# Altium PCB ECE315_F21.PcbDoc (part 2 of 2)
Units mil, origin at the board's own origin, x right, y up, seen from the top; angles counter-clockwise.
Board outline 3940 x 3940 mil, 2 copper layers (Top Layer, Bottom Layer); 72 components, 56 nets, 251 pads, 112 vias.
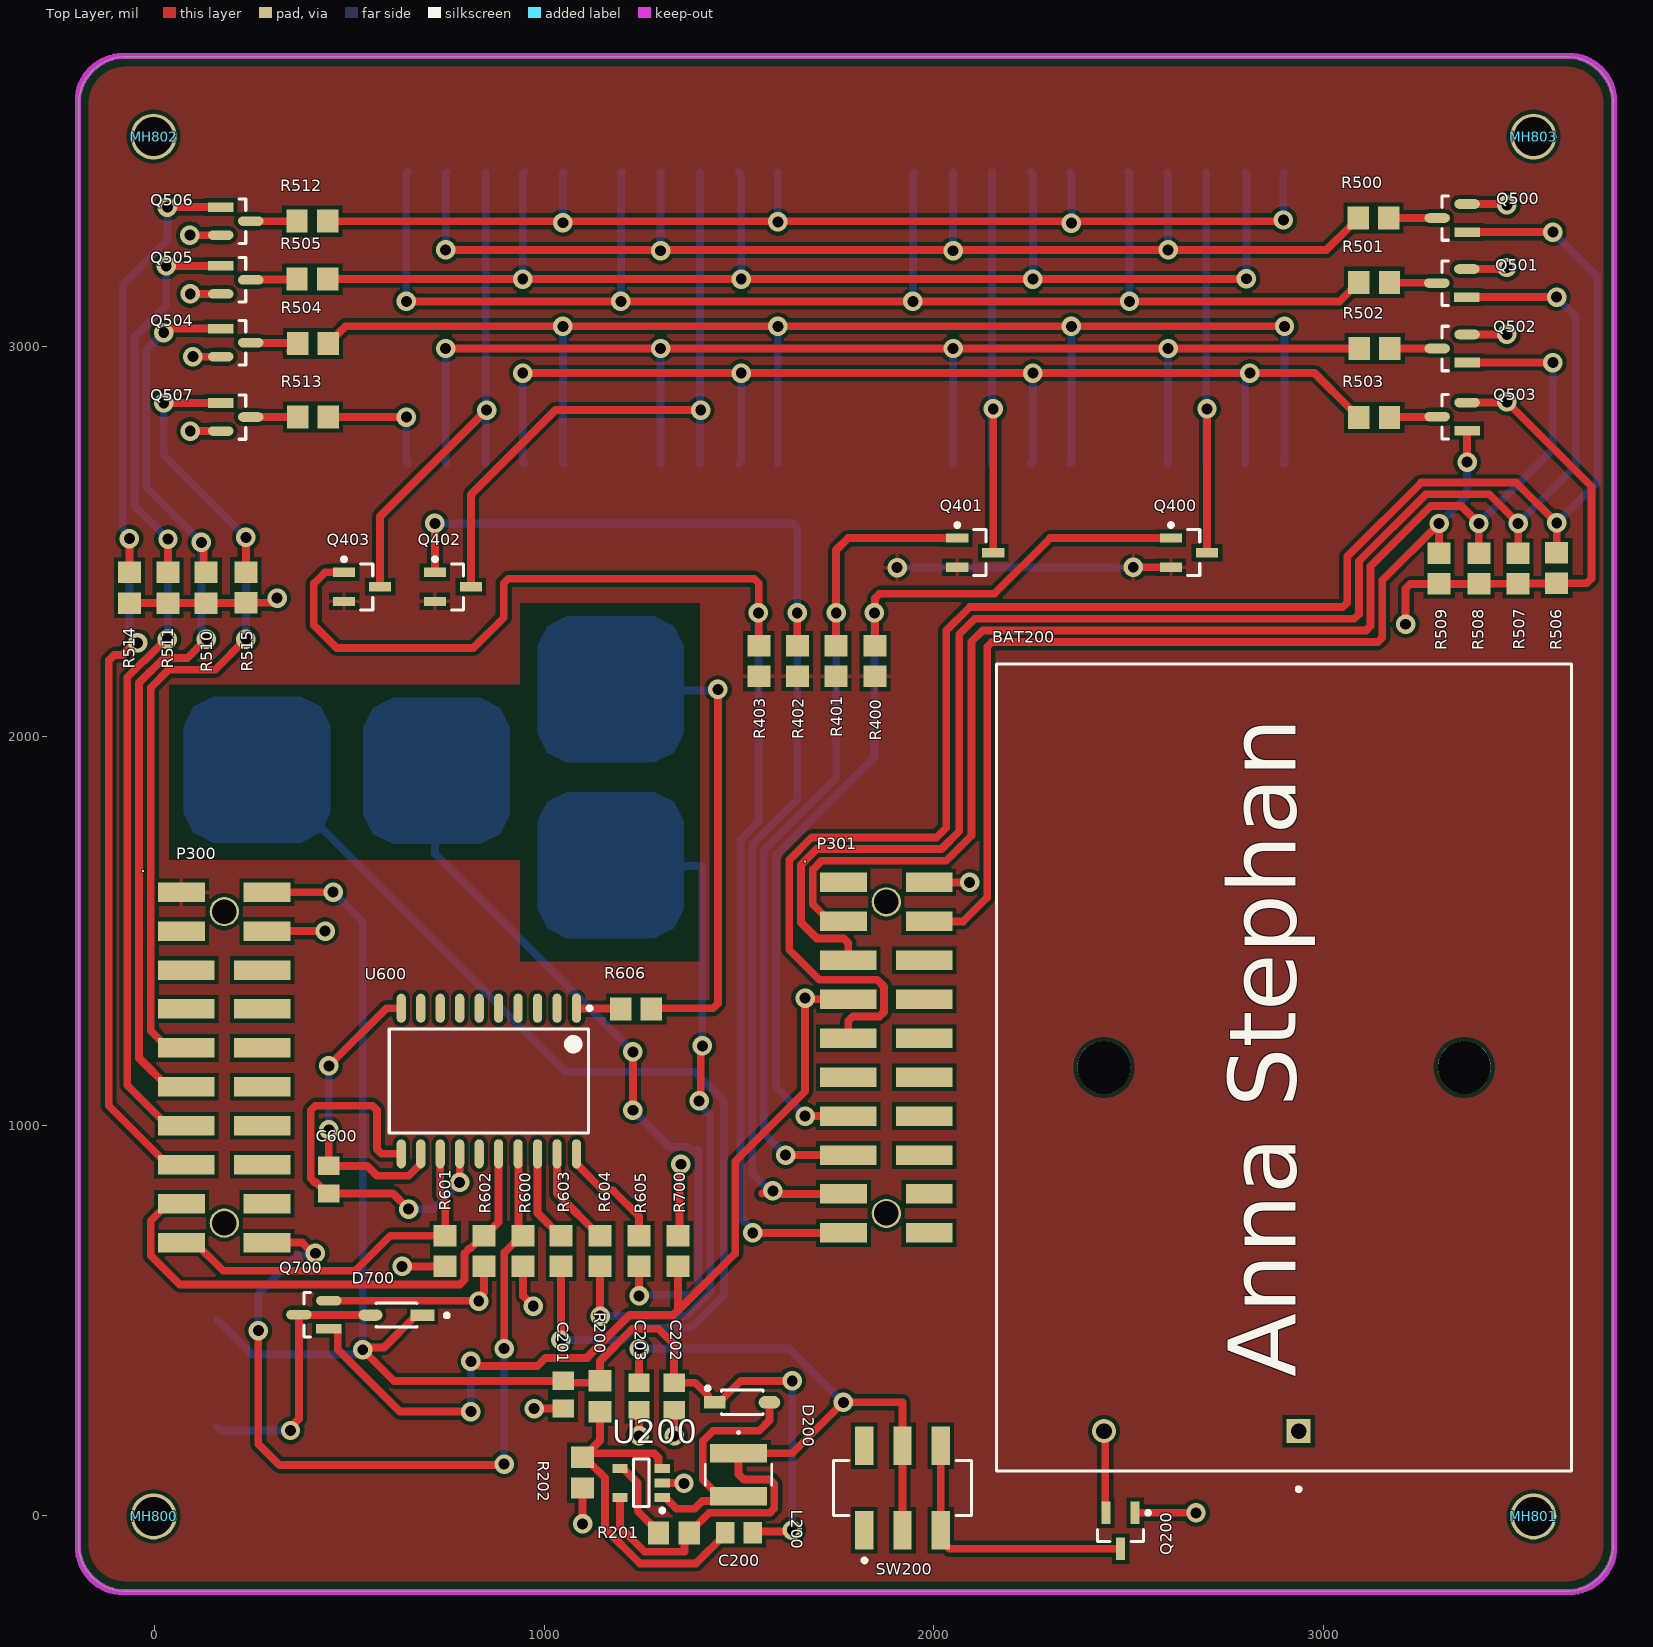
[diagram p0: Top Layer view]

## Part data (continued)
SW200: "C & K COMPONENTS - JS202011SCQN - SWITCH, DPDT, 0.6A, 6VDC, SMD", Actuator Color=Black, Contact Current Rating=300mA, Contact Resistance=70mR, Flammability Rating="UL94 V-2", Manufacturer 1="ITT C&K", Max Operating Temperature=85°C, Max Voltage Rating (DC)=6V, Min Operating Temperature=-20°C, Package Quantity=1, Supplier Part Number 1=401-2002-1-ND, Actuator Length=2mm, Actuator Material=Nylon,Polyamide,PA46, Actuator Type=Standard, Category="Slide Switches", ComponentLink1Description=https://datasheet.ciiva.com/2889/js-29aug13-2889127.pdf?src-supplier=Digi-Key, ComponentLink1URL=https://datasheet.ciiva.com/2889/js-29aug13-2889127.pdf?src-supplier=Digi-Key, ComponentLink2Description=https://datasheet.ciiva.com/23829/1707718-23829488.pdf?src-supplier=Newark, ComponentLink2URL=https://datasheet.ciiva.com/23829/1707718-23829488.pdf?src-supplier=Newark, ComponentLink3Description=https://datasheet.ciiva.com/8625/js-9dec14-8625470.pdf?src-supplier=Avnet, ComponentLink3URL=https://datasheet.ciiva.com/8625/js-9dec14-8625470.pdf?src-supplier=Avnet, ComponentLink4Description=https://datasheet.ciiva.com/2889/js-15sept15-2889128.pdf?src-supplier=Digi-Key, ComponentLink4URL=https://datasheet.ciiva.com/2889/js-15sept15-2889128.pdf?src-supplier=Digi-Key, ComponentLink5Description=https://datasheet.ciiva.com/2889/js-15sept15-2889129.pdf?src-supplier=Digi-Key, ComponentLink5URL=https://datasheet.ciiva.com/2889/js-15sept15-2889129.pdf?src-supplier=Digi-Key, ComponentLink6Description=https://datasheet.ciiva.com/22630/1707718-22630697.pdf?src-supplier=Element14, ComponentLink6URL=https://datasheet.ciiva.com/22630/1707718-22630697.pdf?src-supplier=Element14, Contact Material="Copper Alloy", Contact Plating=Silver, Current Rating=300mA, Depth=7.5mm, Electrical Life=5000Cycles, Housing Material=Nylon, Lead Free="Lead Free", Length=9mm, Manufacturer Part Number 1=JS202011SCQN, Max Current Rating=300mA, Mount="Surface Mount", Orientation=Vertical, Packaging="Tape and Reel", Pricing 1="1=0.55000, 10=0.53000, 25=0.51040, 100=0.44180, 250=0.40252, 500=0.37306 (USD)", Radiation Hardening=No, REACH SVHC="No SVHC", RoHS=Yes, Series=JS, Stock 1=21096, Supplier 1=Digi-Key, Switch Function=On-On, Switch Travel=2mm, Termination="Gull Wing", Throw Configuration=DPDT, Voltage Rating (DC)=6V
U200: "IC REG MULT CONFG ADJ 2.1A SOT23", Case/Package=SOT-23, Manufacturer 1="TI National Semiconductor", Max Input Voltage=5.5V, Max Operating Temperature=125°C, Max Output Current=3A, Max Output Voltage=24V, Min Input Voltage=2.7V, Min Operating Temperature=-40°C, Min Output Voltage=3V, Nominal Supply Current=500uA, Package Quantity=1000, Quiescent Current=7mA, Supplier Part Number 1=LM2735XMF/NOPBCT-ND, Switching Frequency=1.6MHz, Category="Voltage Regulators - Switching", ComponentLink1Description=https://datasheet.ciiva.com/22669/1802021-22669478.pdf?src-supplier=Element14, ComponentLink1URL=https://datasheet.ciiva.com/22669/1802021-22669478.pdf?src-supplier=Element14, Contact Plating=Tin,Matte, Drawn_By="Anna Stephan", Efficiency=90%, Height=1.02mm, Lead Free="Lead Free", Length=2.92mm, Min Supply Voltage=2.7V, Mount="Surface Mount", Number of Outputs=1, Number of Pins=5, Operating Supply Voltage=5.5V, Output Current=3A, Output Type=Adjustable, Output Voltage=24V, Packaging="Tape and Reel", Pricing 1="1=2.27000, 10=2.03900, 25=1.92400, 100=1.63920, 250=1.53912, 500=1.34672 (USD)", Radiation Hardening=No, REACH SVHC="No SVHC", RoHS=Yes, RoHS Compliant=Yes, Series=LM2735, Stock 1=5135, Supplier 1=Digi-Key, Supply Current=500uA, Synchronous Rectifier=No, Topology=Boost,SEPIC, Width=1.6mm
U600: library part AT42QT2120, "IC TOUCH SENSOR 12CH 20SOIC", Case/Package=SOIC, Manufacturer 1="Microchip / Atmel", Manufacturer Part Number 1=AT42QT2120-SU, Max Operating Temperature=85°C, Min Operating Temperature=-40°C, Package Quantity=37, Supplier Part Number 1=AT42QT2120-SU-ND, Category=Uncategorized, ComponentLink1Description=http://www.atmel.com/images/doc9634.pdf, ComponentLink1URL=http://www.atmel.com/images/doc9634.pdf, ComponentLink2Description=https://datasheet.ciiva.com/6483/doc9634-6483479.pdf?src-supplier=Digi-Key, ComponentLink2URL=https://datasheet.ciiva.com/6483/doc9634-6483479.pdf?src-supplier=Digi-Key, ComponentLink3Description=https://datasheet.ciiva.com/12177/doc9634-271534-12177086.pdf?src-supplier=Mouser, ComponentLink3URL=https://datasheet.ciiva.com/12177/doc9634-271534-12177086.pdf?src-supplier=Mouser, Drawn_By="Anna Stephan", Interface=I2C, Packaging=Rail/Tube, Pricing 1="1=1.31000, 25=1.21000, 100=1.09200 (USD)", RoHS=Yes, RoHS Compliant=Yes, Series=QTouch™, Stock 1=417, Supplier 1=Digi-Key

## Via types
v1: diameter 50, hole 28, Top Layer to Bottom Layer, 112 vias

## Nets (pads, with @x,y where several pads share a name; then routed paths per layer and width w, separated by ;. In a path a pad name is that pad's centre, name@x,y a point inside that pad or via, vN(x,y) a via of type N, cw(c..) or ccw(c..) an arc to the next point about the centre after c; other vN are vias at no path point)
3.3V: P300.1 Q400.2 Q401.2 Q402.2 Q403.2 R400.2 R401.2 R402.2 R403.2 | length 705.3
  Top Layer w20: R403.2 R403.2@1551.13,2154.13 ; R402.2@1649.87,2154.13 R402.2 ; R401.2 R401.2@1749.63,2154.13 ; v1@2512,2435 v1(2512.66,2434.34) Q400.2
  Bottom Layer w20: v1(1906,2433.5) 2511.83,2433.5 v1(2512.66,2434.34)
5.0V: C200.2 C201.2 C202.2 D200.1 D700.1 LS700.P P300.2 R200.2 | length 3863.1
  Top Layer w20: P300.2 v1(458,1600) ; D700.1 683.27,509.38 667.23,509.38 588.58,430.74 539.74,430.74 v1(534,425) 614.03,344.97 C201.2 1053.11,340.36 1138.9,340.36 R200.2 1143.5,396.08 1226.38,478.95 1293.5,478.95 1333.5,438.95 C202.2 1387.91,340.4 1420.63,307.69 1420.63,296.15 1426.81,289.97 D200.1 1449.88,289.97 1504.88,344.97 v1(1637,344.97) ; C200.2 1538.8,-41.67 1633.63,-41.67 v1(1637,-38.3)
  Bottom Layer w20: LS700.P 249.59,413 513.88,413 525.88,425 v1(534,425) 534,1524 v1(458,1600) ; v1(1637,344.97) 1637,-38 v1@1639,-40
BUZZER: P301.7 Q700.1 R700.2 | length 2371.9
  Top Layer w20: Q700.1 467.31,478.95 469.65,476.61 469.65,425.71 629.13,266.23 v1(811.63,266.23) ; v1(811.63,395) 819.74,395 831.74,383 982.18,383 1003.18,404 1111.4,404 1111.4,406.4 1219,514 1332.08,514 1343.8,525.72 ; R700.2 1343.8,525.72 ; P301.7 1673,1325 v1(1670,1328) 1670,1088.64 1490.43,909.07 1490.43,672.35 1343.8,525.72
  Bottom Layer w20: v1(811.63,266.23) v1(811.63,395)
BUZZER_Q: D700.2 LS700.N Q700.3 | length 682.2
  Top Layer w20: v1(348.58,217.62) 348.58,225.74 370.09,247.25 Q700.3 370.58,514.49 553.51,514.49 D700.2
  Bottom Layer w20: LS700.N 169.38,217.62 v1(348.58,217.62)
DIG0_N: P301.19 Q403.1 R403.1 | length 3511.1
  Top Layer w20: Q403.1 437.4,2421.4 408.28,2392.28 408.28,2286.06 467.34,2227 818,2227 896,2305 896,2393.28 907.72,2405 1539.28,2405 1551,2393.28 R403.1 ; v1(1535.43,725) P301.19
  Bottom Layer w20: v1(1535.43,725) 1535.43,733.12 1504,764.55 1504,1734.99 1550,1780.99 v1(1550,2317)
DIG0_PWR: DS403.3 DS403.8 Q403.3 | length 1315.3
  Top Layer w20: Q403.3 578.5,2564.5 v1(852,2838)
  Bottom Layer w20: DS403.3 DS403.8
DIG1_N: P301.17 Q402.1 R402.1 | length 3139.6
  Top Layer w20: Q402.1 v1(719.48,2547) ; 1560.13,825.98 1561.19,827.04 1581.48,827.04 v1(1587.22,832.78) ; v1@1580.98,825 P301.17 ; v1(1649.87,2317) 1649.94,2316.93 1649.94,2233.06 R402.1
  Bottom Layer w20: v1(719.48,2547) 1638.15,2547 1649.87,2535.28 v1(1649.87,2317) 1649.87,1838.44 1534,1722.57 1534,877.88 1579.1,832.78 v1(1587.22,832.78)
DIG1_PWR: DS402.3 DS402.8 Q402.3 | length 1666.6
  Top Layer w20: Q402.3 812,2621 1029,2838 v1(1402,2838)
  Bottom Layer w20: DS402.3 1398,2702 1400,2704 DS402.8
DIG2_N: P301.15 Q401.1 R401.1 | length 2222.4
  Top Layer w20: v1(1620,925) P301.15 ; R401.1 1749.5,2478.43 1780.22,2509.14 Q401.1
  Bottom Layer w20: v1(1620,925) 1564,981 1564,1708 1750,1894 v1(1750,2317)
DIG2_PWR: DS401.3 DS401.8 Q401.3 | length 1120.9
  Top Layer w20: Q401.3 v1(2153,2841)
  Bottom Layer w20: DS401.8 DS401.3 DS401.3@2152.52,2702.52
DIG3_N: P301.13 Q400.1 R400.1 | length 2484.5
  Top Layer w20: v1(1670,1025) P301.13 ; R400.1 1849.59,2232.87 1849.59,2354.28 1861.31,2366 2156,2366 2299.14,2509.14 Q400.1
  Bottom Layer w20: v1(1670,1025) 1595,1100 1595,1693 1848,1946 v1(1848,2317)
DIG3_PWR: DS400.3 DS400.8 Q400.3 | length 1117
  Top Layer w20: Q400.3 v1(2702,2841)
  Bottom Layer w20: DS400.3@2699.52,2700.48 2700,2700.96 DS400.8
DOWN: M601.1 R604.1 | length 1768.9
  Top Layer w20: v1@1141.54,509.38 v1(1143.5,511.35) R604.1 ; v1(1398,1064) 1402,1068 1402,1201 v1(1406,1205)
  Bottom Layer w20: v1(1143.5,511.35) 1364.93,511.35 1426.26,572.69 1426.26,1027.62 1398.88,1055 v1@1398,1055 ; M601.1 1406,1667 v1(1406,1205) v1@1405,1204
EN: R201.1 U200.4 | length 210.9
  Top Layer w20: U200.4 1196.68,118.59 1204.55,118.59 1240.25,82.89 1240.25,10.19 1293.5,-43.06 R201.1
FB: C200.1 R200.1 R202.2 U200.3 | length 954.3
  Top Layer w20: R200.1 1143.5,191.74 R202.2@1110.76,159 ; U200.3 1295.31,120.4 1293.5,122.21 1293.5,147.28 1281.79,159 R202.2@1110.76,159 ; C200.1@1464.57,-41.1 C200.1 1464.57,-48.97 1389.98,-123.56 1245.65,-123.56 1156.18,-34.09 1156.18,96.25 1121.28,131.15 1116.06,131.15 R202.2 1108.8,159 R202.2@1110.76,159
GND: BAT200.1 C201.1 C202.1 C203.1 P300.4 P301.2 Q200.1 Q500.2 Q501.2 Q502.2 Q503.2 Q504.2 Q505.2 Q506.2 Q507.2 Q700.2 R202.1 R506.1 R507.1 R508.1 R509.1 R510.1 R511.1 R514.1 R515.1 R600.2 R601.2 R602.2 R700.1 U200.2 | length 3891.2
  Top Layer w20: R514.1 R511.1 R510.1 132.5,2342.71 233.5,2342.71 R515.1 302.28,2343.21 v1(314,2354.93) ; v1@90.02,3135 v1(91.19,3136.17) Q505.2 ; v1(90,3287) Q506.2 ; v1(91.21,2784) Q507.2 ; v1(98.03,2975) Q504.2 ; P300.4 v1(437.4,1500) ; Q700.2 831,551 v1(832,550) 832,558.12 845.71,571.83 R602.2 ; v1(634.97,639) R601.2 ; R600.2 945.71,563.29 v1(972,537) ; v1(974,274) 974.1,274.1 C201.1 ; v1(1098.5,-22.26) R202.1 ; v1(1243.5,204) C203.1 ; U200.2 1358,83 v1(1359,82) ; v1(1333.5,204) C202.1 ; R700.1 1347.53,721.47 1347.53,897.68 v1(1351.26,901.41) ; P301.2 v1(2092.55,1625) ; Q200.1 v1(2673.74,6.26) v1@2675,5 ; v1(3212,2288) 3212,2379.91 3223.72,2391.63 R509.1 R508.1 3400.18,2391.81 3500.81,2391.81 R507.1 3501.5,2392.5 3599.5,2392.5 R506.1 3677.28,2393 3689,2404.72 3689,2641.98 v1(3471.98,2859) 3469.97,2856.99 Q503.2 ; Q501.2 3468.06,3200.06 v1(3472,3204) ; Q502.2 v1(3472,3032.02) ; Q500.2 3469.98,3367.02 v1(3472,3365)
  Bottom Layer w20: v1(2092.55,1625) v1@2097,1629.44
HOUR: M603.1 R606.1 | length 1252.2
  Top Layer w20: R606.1 1277.48,1302.01 1434.28,1302.01 1446,1313.72 v1(1446,2120.5)
  Bottom Layer w20: M603.1 1443,2118 v1@1446,2115
I2CSCL: P300.17 R602.1 U600.16 | length 1391.8
  Top Layer w20: P300.17 33.5,800 -10.5,756 -10.5,667.13 64.19,592.44 783.11,592.44 795.74,605.08 795.74,672.99 808.38,685.63 811.63,685.63 843.74,717.74 R602.1 847.68,717.74 883,753.06 U600.16
I2CSDA: P300.19 R601.1 U600.13 | length 959.9
  Top Layer w20: P300.19 103.5,700 175.76,627.74 515.02,627.74 605.02,717.74 R601.1 745.71,808.81 733,821.51 U600.13
MINUTE: M602.1 R605.1 | length 1888.1
  Top Layer w20: v1@1226,1192 v1(1228,1190) v1(1228,1040) ; v1(1243.5,563.29) R605.1
  Bottom Layer w20: 719.48,1914.5 719.48,1698.52 v1(1228,1190) ; v1(1228,1040) 1321.59,946.41 1369.9,946.41 1379.57,936.74 1396.26,936.74 1396.26,585.11 1377.15,566 1246.21,566 v1(1243.5,563.29)
SEG_A: DS400.7 DS401.7 DS402.7 DS403.7 R500.2 | length 3186
  Top Layer w20: v1@742,3249 v1(747.03,3249) v1(2602,3249) 3008.26,3249 3070.73,3311.47 3072.7,3311.47 3090.26,3329.03 R500.2
  Bottom Layer w20: v1(747.03,3249) 747.03,3445.06 DS403.7 ; v1(1299,3247) 1299,3447.03 DS402.7 ; v1(2050,3247) DS401.7 ; DS400.7 2602,3446.03 v1(2602,3249)
SEG_A_R: Q500.3 R500.1 | length 124
  Top Layer w20: R500.1 Q500.3
SEG_B: DS400.6 DS401.6 DS402.6 DS403.6 R501.2 | length 3796.9
  Top Layer w20: v1(646,3117) v1(1197,3117) v1(1947,3117) v1(2503,3117) 3042.89,3117 3072.36,3146.47 3074.33,3146.47 3091.89,3164.03 R501.2
  Bottom Layer w20: v1(646,3117) 646,3444.03 DS403.6 ; v1(1197,3117) 1197,3445.03 DS402.6 ; v1(1947,3117) 1947,3445.03 DS401.6 ; DS400.6 2503,3445.03 v1(2503,3117)
SEG_B_R: Q501.3 R501.1 | length 122.3
  Top Layer w20: R501.1 3171.7,3164.93 3291.21,3164.93 Q501.3
SEG_C: DS400.4 DS401.4 DS402.4 DS403.4 R502.2 | length 3539.6
  Top Layer w20: v1@742,2990.97 v1(747.03,2996) v1(1299,2996) v1(2050,2996) v1(2602,2996) R502.2
  Bottom Layer w20: v1(747.03,2996) 747.03,2702.97 DS403.4 ; v1(1299,2996) 1299,2701 DS402.4 ; DS401.4 v1(2050,2996) ; DS400.4 2602,2702 v1(2602,2996)
SEG_C_R: Q502.3 R502.1 | length 121.3
  Top Layer w20: R502.1 Q502.3
SEG_D: DS400.2 DS401.2 DS402.2 DS403.2 R503.2 | length 3138.9
  Top Layer w20: v1(945,2933) v1(1506,2933) v1(2255,2933) v1(2812,2933) 2977.89,2933 3072.36,2838.53 3074.33,2838.53 3091.89,2820.97 R503.2
  Bottom Layer w20: v1(945,2933) 945,2705 DS403.2 ; DS402.2 1506,2706 v1(1506,2933) ; DS401.2 2255,2705 v1(2255,2933) ; DS400.2 2800,2912.88 2812,2924.88 v1(2812,2933)
SEG_D_R: Q503.3 R503.1 | length 123.2
  Top Layer w20: R503.1 3171.7,2820.07 3292.1,2820.07 Q503.3
SEG_DP: DS403.5 R513.2 | length 321.9
  Top Layer w20: R513.2 v1(646,2820)
  Bottom Layer w20: v1(646,2820) 646,2704 DS403.5
SEG_DP_R: Q507.3 R513.1 | length 120.5
  Top Layer w20: Q507.3 R513.1
SEG_E: DS400.1 DS401.1 DS402.1 DS403.1 R504.2 | length 3889.5
  Top Layer w20: R504.2 445.74,3011 463.3,3028.56 465.27,3028.56 489.71,3053 v1(1048,3053) v1(1600,3053) v1(2354,3053) v1(2901,3053)
  Bottom Layer w20: v1(1048,3053) 1048,2702 DS403.1 ; DS402.1 v1(1600,3053) ; DS401.1 2354,2704 v1(2354,3053) ; DS400.1 2901,2701 v1(2901,3053)
SEG_E_R: Q504.3 R504.1 | length 150.1
  Top Layer w20: Q504.3 247.35,3010.1 365.93,3010.1 R504.1 367,3007.06 349.44,2989.5 R504.1@347.47,2989.5
SEG_EN_A: P301.9 Q500.1 R506.2 | length 4637.9
  Top Layer w20: P301.9 1781,1269.28 1792.72,1281 1861.37,1281 1872.5,1292.13 1872.5,1357.87 1855.37,1375 1706.63,1375 1629.5,1452.13 1629.5,1682.72 1687.43,1740.65 2007.7,1740.65 2032.55,1765.5 2032.55,2272 2092.55,2332 3050.28,2332 3062,2343.72 3062,2461.85 3251.78,2651.63 3496.37,2651.63 v1(3600,2548) R506.2 ; Q500.1 v1(3590,3294.98)
  Bottom Layer w20: v1(3590,3294.98) 3704.02,3180.95 3704.02,2652.02 v1(3600,2548)
SEG_EN_B: P301.5 Q501.1 R507.2 | length 3947.5
  Top Layer w20: P301.5 1781,1469.28 1769.29,1481 1700.63,1481 1659.5,1522.13 1659.5,1670.3 1699.86,1710.65 2020.13,1710.65 2066,1756.52 2066,2262 2106,2302 3080.28,2302 3092,2313.72 3092,2449.43 3264.2,2621.63 3426.37,2621.63 v1(3501,2547) R507.2 ; Q501.1 v1(3599.5,3128.01)
  Bottom Layer w20: v1(3501,2547) 3649,2695 3649,3078.51 v1(3599.5,3128.01)
SEG_EN_C: P301.3 Q502.1 R508.2 | length 3471.7
  Top Layer w20: P301.3 1733.5,1525 1689.5,1569 1689.5,1657.87 1712.28,1680.65 2032.55,1680.65 2097,1745.09 2097,2242.71 2126.29,2272 3110.28,2272 3122,2283.72 3122,2437 3276.63,2591.63 3355,2591.63 v1(3400,2546.63) R508.2 ; Q502.1 v1(3590,2960)
  Bottom Layer w20: v1(3400,2546.63) 3590,2736.63 v1(3590,2960)
SEG_EN_D: P301.4 Q503.1 R509.2 | length 2540.3
  Top Layer w20: P301.4 2076,1525 2137.55,1586.56 2137.55,2230.28 2149.27,2242 3140.28,2242 3152,2253.72 3152,2400.63 v1(3298,2546.63) R509.2 ; Q503.1 v1(3369.91,2704.09) v1@3370,2704
  Bottom Layer w20: v1(3298,2546.63) 3369.91,2618.54 v1(3369.91,2704.09)
SEG_EN_DP: P300.9 Q507.1 R515.2 | length 2215.9
  Top Layer w20: v1(23.03,2856.02) Q507.1 ; P300.9 33.5,1200 -10.5,1244 -10.5,2125.04 35.46,2171 155,2171 v1(234,2250) ; R515.2 v1(234,2510.95)
  Bottom Layer w20: v1(23.03,2856.02) 23.03,2721.92 v1(234,2510.95) v1(234,2250)
SEG_EN_E: P300.11 Q504.1 R510.2 | length 2437.5
  Top Layer w20: v1(23.03,3037) 31.15,3037 41.18,3047.02 Q504.1 ; P300.11 33.5,1100 -40.5,1174 -40.5,2137.47 23.03,2201 83.5,2201 v1(132.5,2250) ; v1(119.95,2497.95) 125.69,2492.21 125.69,2427.26 R510.2
  Bottom Layer w20: v1(23.03,3037) -21.97,2992 -21.97,2639.86 v1(119.95,2497.95) 119.95,2270.67 132.5,2258.12 v1(132.5,2250)
SEG_EN_F: P300.13 Q505.1 R511.2 | length 2649.9
  Top Layer w20: v1(29.61,3208.21) Q505.1 ; v1(32.67,2250) 29.61,2250 -25.18,2195.21 -26.92,2195.21 -70.5,2151.64 -70.5,1104 33.5,1000 P300.13 ; v1@32.67,2508 v1(34,2506.67) R511.2
  Bottom Layer w20: v1@23.87,3202.47 v1(29.61,3208.21) 29.61,3107.21 -51.97,3025.64 -51.97,2592.64 v1(34,2506.67) 33.33,2506 33.33,2250.67 v1(32.67,2250)
SEG_EN_G: P300.15 Q506.1 R514.2 | length 2907
  Top Layer w20: R514.2 v1(-65,2508) v1@-63,2510 ; v1(-43.82,2240.21) -51.94,2240.21 -83.01,2209.14 -103.86,2209.14 -118,2195 -118,1051.5 33.5,900 P300.15 ; v1(32.67,3359.02) Q506.1
  Bottom Layer w20: v1(-43.82,2240.21) -43.82,2248.33 -65,2269.51 v1(-65,2508) -65,2516.12 -81.97,2533.08 -81.97,3160.28 32.67,3274.91 v1(32.67,3359.02)
SEG_F: DS400.9 DS401.9 DS402.9 DS403.9 R505.2 | length 3463.2
  Top Layer w20: R505.2 v1(945,3174.16) v1(1506,3174.16) v1(2255,3174.16) 2802.16,3174.16 v1(2803.08,3175.08) v1@2804,3176
  Bottom Layer w20: v1(945,3174.16) 945,3443.03 DS403.9 ; DS402.9 1506,3442.03 v1(1506,3174.16) ; DS401.9 2255,3443.03 v1(2255,3174.16) ; DS400.9 2803.08,3444.95 v1(2803.08,3175.08)
SEG_F_R: Q505.3 R505.1 | length 119.5
  Top Layer w20: Q505.3 247.35,3173.08 364.36,3173.08 R505.1@365.26,3172.19
SEG_G: DS400.10 DS401.10 DS402.10 DS403.10 R512.2 | length 2970.9
  Top Layer w20: R512.2 2895,3323 v1(2898,3326) v1@2901,3329
  Bottom Layer w20: v1(1048,3319) 1048,3446.03 DS403.10 ; v1(1600,3321) DS402.10 ; DS401.10 2354,3444.03 v1(2354,3318) ; v1(2898,3326) 2898,3446.03 DS400.10
SEG_G_R: Q506.3 R512.1 | length 118.8
  Top Layer w20: Q506.3 R512.1
SW: D200.2 L200.2 U200.1 | length 619.8
  Top Layer w20: U200.1 1311.01,45.6 1339.72,16.89 1386,16.89 1405.61,36.5 1437,36.5 L200.2@1449.5,49 ; L200.2 L200.2@1449.5,49 ; D200.2 1578.5,243.78 1551.8,217.08 1433.71,217.08 1407,190.37 1407,91.5 L200.2@1449.5,49
TOUCH_IRQ: P300.20 R600.1 U600.17 | length 2189.9
  Top Layer w20: v1(266,474) 266,183 320.25,128.75 894.53,128.75 v1(897.18,131.4) ; P300.20 378.5,700 405.76,672.74 v1(412.5,672.74) ; v1(897.18,428) 897.18,674.43 922.75,700 926,700 943.74,717.74 R600.1 933.69,729.76 933.69,927.3 U600.17
  Bottom Layer w20: v1(266,474) 266,568 365,667 406.76,667 v1(412.5,672.74) ; v1(897.18,131.4) v1(897.18,428)
UP: M600.1 R603.1 | length 2737.2
  Top Layer w20: v1(1043,450) 1043.5,450.5 R603.1
  Bottom Layer w20: 245,1948 1054.18,1138.82 1386.82,1138.82 1462,1063.64 1462,566 1377.35,481.35 1233.22,481.35 1201.86,450 v1(1043,450)
USR0: R603.2 U600.18 | length 236.5
  Top Layer w20: U600.18 983,776.28 1041.54,717.74 R603.2
USR1: R604.2 U600.19 | length 257.2
  Top Layer w20: U600.19 1033,826.28 1141.54,717.74 R604.2
USR2: R605.2 U600.20 | length 291.7
  Top Layer w20: U600.20 1083,902.4 1150.8,834.6 1176.39,834.6 1243.5,767.49 R605.2
USR3: R606.2 U600.1 | length 114.6
  Top Layer w20: U600.1 1084,1301 1195.73,1301 R606.2
VBAT_A: Q200.3 SW200.3 SW200.6 | length 713
  Top Layer w20: SW200.6 SW200.3 2018.43,-63.89 2040.79,-86.26 Q200.3
VBAT_POS: BAT200.2 Q200.2 | length 212
  Top Layer w20: BAT200.2 2440.79,212.76 2440.79,8.07 Q200.2
VDD: C600.1 U600.11 U600.14 | length 1038.7
  Top Layer w20: U600.11 582.38,927.99 570.66,939.71 570.66,1039.79 558.94,1051.5 412.16,1051.5 400.44,1039.79 400.44,865.65 411.57,854.52 414.82,854.52 443.06,826.28 C600.1 611.72,826.28 v1(652,786) ; v1(783,854.62) U600.14
  Bottom Layer w20: v1(652,786) 714.38,786 v1(783,854.62)
VIN: C203.2 L200.1 R201.2 SW200.2 SW200.5 U200.5 | length 2259.8
  Top Layer w20: U200.5 1194.87,-30.35 1258.07,-93.56 1360.53,-93.56 1360.53,-56.75 R201.2 1372.24,-43.06 1389.8,-25.5 1391.77,-25.5 1423.78,6.5 1579.87,6.5 1591,17.63 1591,80.37 1579.87,91.5 1513,91.5 1499,105.5 L200.1 1637,159 1767.97,289.97 1920,289.97 SW200.5 SW200.2 ; C203.2 v1(1243.5,428)
  Bottom Layer w20: v1(1243.5,428) 1629.5,428 v1@1768.5,289
  other v1: 1768.5,289.97
VSS: C600.2 U600.10 U600.12 | length 814.7
  Top Layer w20: v1(447,990) C600.2 545.11,897.14 570.66,871.59 652.19,871.59 683,902.4 U600.12 ; v1(447,1154) 595.01,1302.01 U600.10 U600.10@633,1276.42
  Bottom Layer w20: v1(447,990) v1(447,1154)
pads on no net: BAT200. DS400.5 DS401.5 DS402.5 LS700.M1 LS700.M2 MH800.1 MH801.1 MH802.1 MH803.1 P300. P300.3 P300.5 P300.6 P300.7 P300.8 P300.10 P300.12 P300.14 P300.16 P300.18 P301. P301.1 P301.6 P301.8 P301.10 P301.11 P301.12 P301.14 P301.16 P301.18 P301.20 SW200.1 SW200.4 U600.2 U600.3 U600.4 U600.5 U600.6 U600.7 U600.8 U600.9 U600.15

## Polygon pours and split planes (outlines as drawn)
3.3V on Top Layer "3_3V" (solid, pour order 0): -200,3759 -184,3743 3754,3743 3754,-200 -200,-200
GND on Bottom Layer "GND" (hatched 45Degree grid 70 track 7, pour order 1): -191,3742 3746,3742 3755,3733 3755,-200 -200,-200

## Keep-outs
Keep-Out Layer:
  lines w10: -200,3642.21 cw(c-82.25,3631.81) -69.47,3749.32 3641.77,3750.01 cw(c3641.77,3745) 3642.21,3750 ; -200,3642.21 ccw(c-195,3641.77) -200.01,3641.77 -199.32,-69.48 ccw(c-81.81,-82.25) -92.21,-200 ccw(c-91.77,-195) -91.77,-200.01 3619.47,-199.32 ccw(c3632.25,-81.81) 3750,-92.21 ; -200,3642.21 -200,3642.21 ; 3642.21,3750 cw(c3631.81,3632.25) 3750.01,3632.25 cw(c3631.81,3632.25) 3749.32,3619.47 3750.01,-91.77 ; 3642.21,3750 3642.21,3750 ; 3750,-92.21 ccw(c3745,-91.77) 3750.01,-91.77 ; 3750,-92.21 3750,-92.21 ; 3750.01,-91.77 ccw(c3745,-91.77) 3750.01,-91.77 ; -195,-75 ccw(c-75,-75) -75,-195 3625,-195 ccw(c3625,-75) 3745,-75 3745,3625 ccw(c3625,3625) 3625,3745 -75,3745 ccw(c-75,3625) -195,3625 -195,-75

## Other copper
Top Layer:
  pour cut-out: 1400,2341.8 1400,1422.2 938,1422.2 938,1683.7 37,1683.7 37,1703.7 37,2132.7 938,2132.7 938,2341.8

## Silkscreen, mask and mechanical layers (free items; w line width, h text height)
Top Overlay:
  text "Anna Stephan" at 2987.75,353.75 h300 r90
Bottom Overlay:
  circle w100: c1768.5,2950 r25
  circle w100: c1768.5,3250 r25
  text "+" at 1094,2010.8 h360
  text "M" at 150,1805 h360
  text "H" at 630,1800 h360
  text "-" at 1133.02,1579.7 h360
Mechanical 2:
  the board outline again, w10
Mechanical 5:
  text "ECE315 / F21" at -200,-200 h30

## Text inside footprints (layer, text, board x,y; h text height)
LS700: Mechanical 10 "Anna Stephan" at -161.2,598.21 h30 r180
U600: Mechanical 10 "Anna Stephan" at 549,1259 h30 r270